# EAGLE board Hank2 (EAGLE 7.7.0)
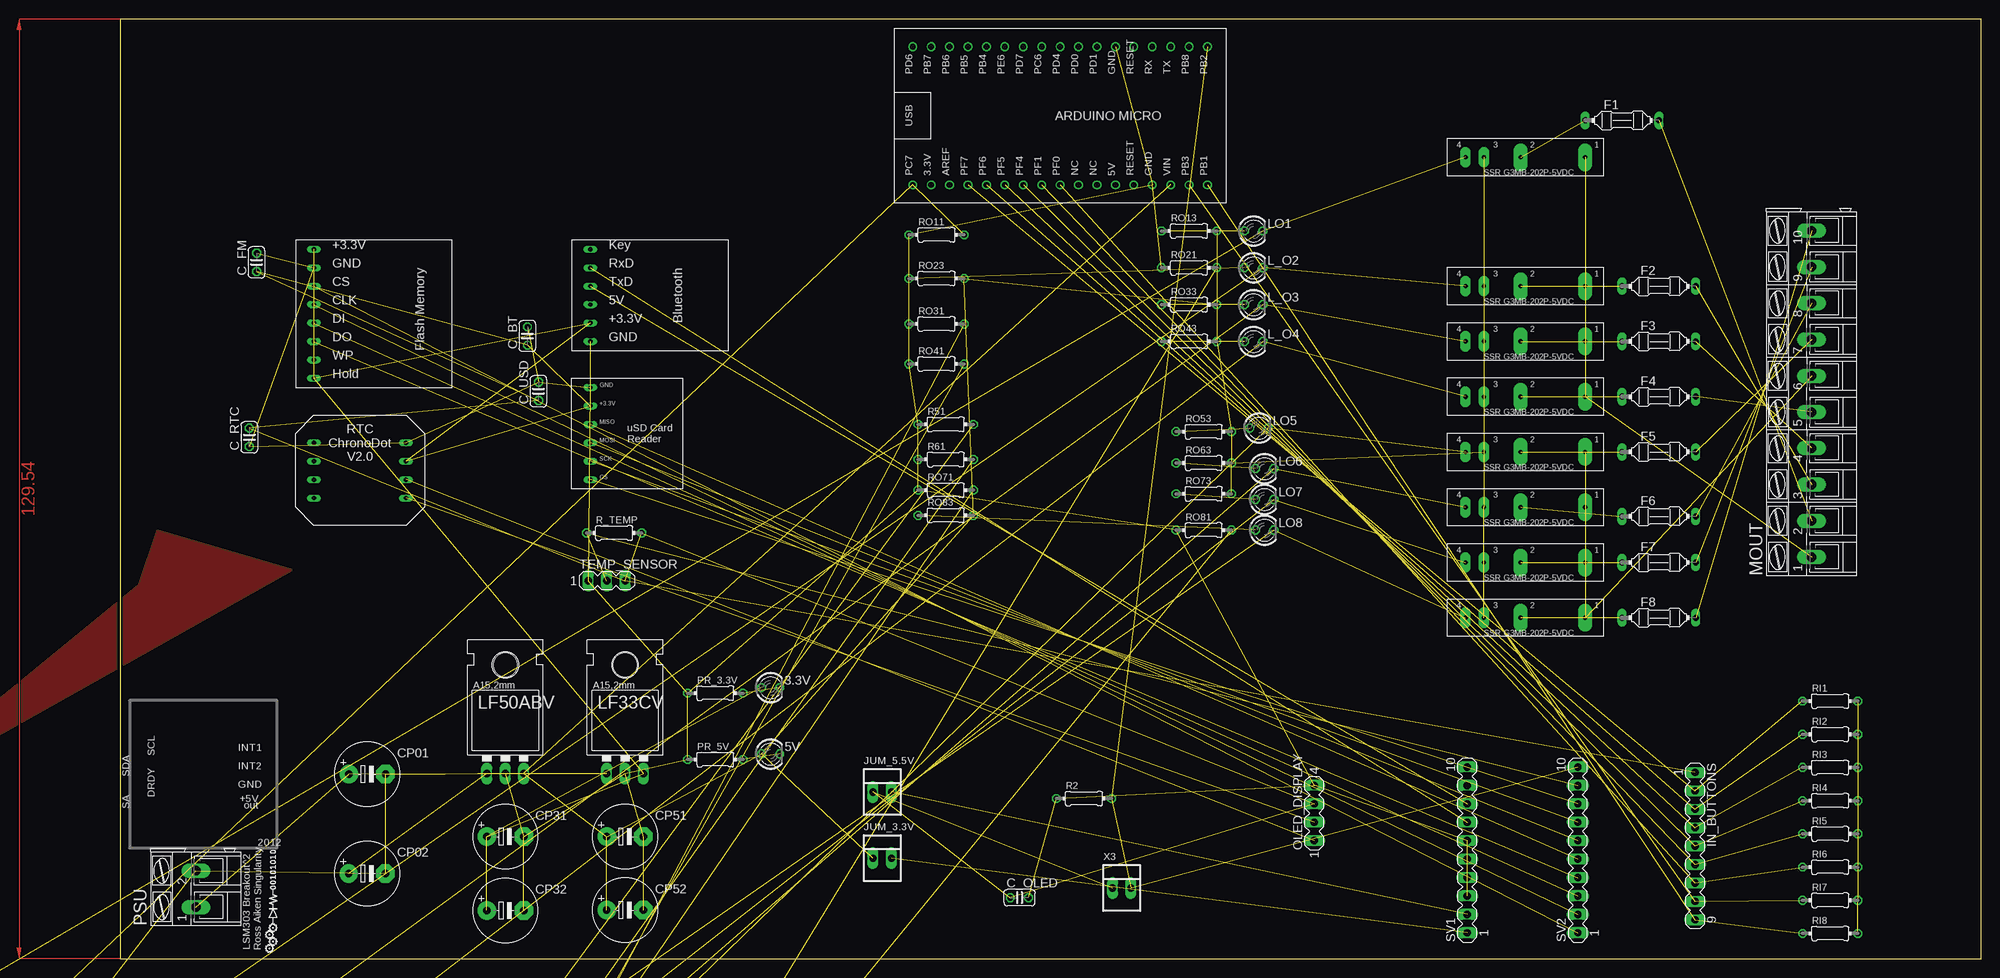
[diagram p0: board, top side]

Size 256.54 x 129.54 mm. Coordinates in mm from the lower left corner, seen from the top.
Outline: 0,0 256.52,0 256.54,129.54 0,129.54 0,0
Copper layers (1*16): Top 0.0356mm / dielectric 1.5011mm / Bottom 0.0356mm
Design rules "default": minimum track width 6mil, minimum drill 13mil, track to track 6mil, track to pad 6mil, pad to pad 6mil, via to via 6mil, smd to smd 0mil, copper to edge 15mil, drill to drill 6mil, minimum pad ring 7mil, minimum via ring 7mil, stop-mask expansion 4mil, vias tented up to drill 0mil, thermal gap 10mil
Net classes: 0 default: width 0.203 mm; 1 vcc: width 0.254 mm

## Footprints (pad centres in the part's own frame; a part is rotated, then mirrored left to right if it is on the bottom)
LED3MM = drill 0.813 octagon: A -1.27,0; K 1.27,0
ARDUINOMICRO_FOOTPRINT = drill 0.8: 3.3V -8.89,11.43; 5V -8.89,-13.97; AREF -8.89,8.89; GND -8.89,-19.05; GND2 10.16,-13.97; NC1 -8.89,-8.89; NC2 -8.89,-11.43; PB1 -8.89,-26.67; PB2 10.16,-26.67; PB3 -8.89,-24.13; PB4 10.16,3.81; PB5 10.16,6.35; PB6 10.16,8.89; PB7 10.16,11.43; PB8 10.16,-24.13; PC6 10.16,-3.81; PC7 -8.89,13.97; PD0 10.16,-8.89; PD1 10.16,-11.43; PD4 10.16,-6.35; PD6 10.16,13.97; PD7 10.16,-1.27; PE6 10.16,1.27; PF0 -8.89,-6.35; PF1 -8.89,-3.81; PF4 -8.89,-1.27; PF5 -8.89,1.27; PF6 -8.89,3.81; PF7 -8.89,6.35; RESET 10.16,-16.51; RESET1 -8.89,-16.51; RX 10.16,-19.05; TX 10.16,-21.59; VIN -8.89,-21.59
C025-024X044 = drill 0.813 octagon: 1 -1.27,0; 2 1.27,0
E5-8,5 = drill 1.016 pad 2.54: + -2.54,0 | drill 1.016 pad 2.54 octagon: - 2.54,0
PICOFUSE = drill 0.813 long: 1 -5.08,0; 2 5.08,0
MA09-1 = drill 1.016 long: 1 -10.16,0; 2 -7.62,0; 3 -5.08,0; 4 -2.54,0; 5 0,0; 6 2.54,0; 7 5.08,0; 8 7.62,0; 9 10.16,0
22-23-2021 = drill 1 long: 1 -1.27,0; 2 1.27,0
78XXL = drill 1.016 long: GND 0,-3.81; IN -2.54,-3.81; OUT 2.54,-3.81 | hole 3.302: 0,11.176
AK300/10 = drill 1.321 long: 1 -22.504,0; 2 -17.501,0; 3 -12.497,0; 4 -7.493,0; 5 -2.515,0; 6 2.489,0; 7 7.493,0; 8 12.497,0; 9 17.501,0; 10 22.504,0
MA04-1 = drill 1.016 long: 1 -3.81,0; 2 -1.27,0; 3 1.27,0; 4 3.81,0
0204/7 = drill 0.813 octagon: 1 -3.81,0; 2 3.81,0
AK300/2 = drill 1.321 long: 1 -2.515,0; 2 2.489,0
SSR_FOOTPRINT = drill 0.6 pad 1.93 long: 1 10.16,0; 2 1.27,0 | drill 0.6 pad 1.422 long: 3 -3.81,0; 4 -6.35,0
MA10-1 = drill 1.016 long: 1 -11.43,0; 2 -8.89,0; 3 -6.35,0; 4 -3.81,0; 5 -1.27,0; 6 1.27,0; 7 3.81,0; 8 6.35,0; 9 8.89,0; 10 11.43,0
TO92-ECB = drill 0.813 long: B 2.54,0; C 0,0; E -2.54,0
MA03-1 = drill 1.016 long: 1 -2.54,0; 2 0,0; 3 2.54,0
FLASHMEMORY_FOOTPRINT = drill 0.6 long: CLK -8.89,1.27; CS -8.89,3.81; DI -8.89,-1.27; DO -8.89,-3.81; GND -8.89,6.35; HOLD -8.89,-8.89; VCC -8.89,8.89; WP -8.89,-6.35
BLUETOOTH_FOOTPRINT = drill 0.6 long: 5V -8.89,1.27; +3.3 -8.89,-1.27; GND -8.89,-3.81; KEY -8.89,8.89; RXD -8.89,6.35; TXD -8.89,3.81
RTC_FOOTPRINT = drill 0.6 long: 32K -6.35,2.54; +3.3V 6.35,2.54; BAT -6.35,5.08; GND 6.35,5.08; RST -6.35,-2.54; SCL 6.35,0; SDA 6.35,-2.54; SQW -6.35,0
SD_CARD_READER_FOOTPRINT = drill 0.6 long: +3.3 -5.08,5.08; CS -5.08,-5.08; GND -5.08,7.62; MISO -5.08,2.54; MOSI -5.08,0; SCK -5.08,-2.54

## Placement (x,y rotation side)
3.3V  [LED3MM]  89.63,37.36 0 top
5V  [LED3MM]  89.63,28.2 0 top
ARDUINO  ARDUINO_MICRO  [ARDUINOMICRO_FOOTPRINT]  123.19,115.57 90 top
C_BT  0.1uF  [C025-024X044]  56.11,85.83 90 top
C_FM  0.1uF  [C025-024X044]  18.77,95.99 90 top
C_OLED  0.1uF  [C025-024X044]  123.93,8.38 0 top
C_RTC  0.1uF  [C025-024X044]  17.77,71.86 90 top
C_USD  0.1uF  [C025-024X044]  57.64,78.21 90 top
CP01  100u  [E5-8,5]  34.02,25.42 0 top
CP02  100n  [E5-8,5]  34.01,11.73 0 top
CP31  100u  [E5-8,5]  53.06,16.8 0 top
CP32  100n  [E5-8,5]  53.06,6.63 0 top
CP51  100u  [E5-8,5]  69.57,16.81 0 top
CP52  100n  [E5-8,5]  69.57,6.67 0 top
F1  SM 092 A0 2A  [PICOFUSE]  207.01,115.57 0 top
F2  SM 092 A0 2A  [PICOFUSE]  212.09,92.71 0 top
F3  SM 092 A0 2A  [PICOFUSE]  212.09,85.09 0 top
F4  SM 092 A0 2A  [PICOFUSE]  212.09,77.47 0 top
F5  SM 092 A0 2A  [PICOFUSE]  212.09,69.85 0 top
F6  SM 092 A0 2A  [PICOFUSE]  212.09,60.96 0 top
F7  SM 092 A0 2A  [PICOFUSE]  212.09,54.61 0 top
F8  SM 092 A0 2A  [PICOFUSE]  212.09,46.99 0 top
IN_BUTTONS  [MA09-1]  217.06,15.51 270 top
JUM_3.3V  22-23-2021  [22-23-2021]  105.02,13.83 0 top
JUM_5.5V  22-23-2021  [22-23-2021]  105.02,22.96 0 top
L_O2  [LED3MM]  156.21,95.25 0 top
L_O3  [LED3MM]  156.21,90.17 0 top
L_O4  [LED3MM]  156.21,85.09 0 top
LF33CV  [78XXL]  69.57,29.32 0 top
LF50ABV  [78XXL]  53.05,29.32 0 top
LO1  [LED3MM]  156.21,100.33 0 top
LO5  [LED3MM]  156.95,73.15 0 top
LO6  [LED3MM]  157.73,67.55 0 top
LO7  [LED3MM]  157.73,63.31 0 top
LO8  [LED3MM]  157.73,59.08 0 top
MOUT  [AK300/10]  233.14,77.86 90 top
OLED_DISPLAY  [MA04-1]  164.59,20.05 90 top
PR_3.3V  1k  [0204/7]  82.01,36.59 0 top
PR_5V  1k  [0204/7]  82.01,27.44 0 top
PSU  [AK300/2]  10.39,9.61 90 top
R2  [0204/7]  132.83,22.05 0 top
R51  10K  [0204/7]  113.78,73.66 0 top
R61  10K  [0204/7]  113.78,68.82 0 top
R_TEMP  4.7K  [0204/7]  68.06,58.68 0 top
RI1  330  [0204/7]  235.7,35.49 0 top
RI2  330  [0204/7]  235.7,30.91 0 top
RI3  330  [0204/7]  235.7,26.34 0 top
RI4  330  [0204/7]  235.7,21.76 0 top
RI5  330  [0204/7]  235.7,17.18 0 top
RI6  330  [0204/7]  235.7,12.61 0 top
RI7  330  [0204/7]  235.7,8.03 0 top
RI8  [0204/7]  235.7,3.45 0 top
RO11  10K  [0204/7]  112.51,99.79 0 top
RO12  10K  [0204/7]  -34.29,-25.4 0 top  (outside the outline)
RO13  1k  [0204/7]  147.32,100.33 0 top
RO21  150  [0204/7]  147.32,95.25 0 top
RO22  10K  [0204/7]  -34.29,-203.2 0 top  (outside the outline)
RO23  1k  [0204/7]  112.51,93.78 0 top
RO31  150  [0204/7]  112.51,87.5 0 top
RO32  10K  [0204/7]  -34.29,-190.5 0 top  (outside the outline)
RO33  [0204/7]  147.32,90.17 0 top
RO41  10k  [0204/7]  112.51,81.99 0 top
RO42  10K  [0204/7]  -34.29,-177.8 0 top  (outside the outline)
RO43  1k  [0204/7]  147.32,85.09 0 top
RO52  10K  [0204/7]  -34.29,-127 0 top  (outside the outline)
RO53  1k  [0204/7]  149.34,72.65 0 top
RO62  10K  [0204/7]  -34.29,-139.7 0 top  (outside the outline)
RO63  1k  [0204/7]  149.34,68.32 0 top
RO71  10K  [0204/7]  113.78,64.58 0 top
RO72  10K  [0204/7]  -34.29,-152.4 0 top  (outside the outline)
RO73  1k  [0204/7]  149.34,64.08 0 top
RO81  10k  [0204/7]  149.34,59.08 0 top
RO82  10K  [0204/7]  -34.29,-165.1 0 top  (outside the outline)
RO83  1k  [0204/7]  113.78,61.11 0 top
SSR1  SSR  [SSR_FOOTPRINT]  191.77,110.49 0 top
SSR2  SSR  [SSR_FOOTPRINT]  191.77,92.71 0 top
SSR3  SSR  [SSR_FOOTPRINT]  191.77,85.09 0 top
SSR4  SSR  [SSR_FOOTPRINT]  191.77,77.47 0 top
SSR5  SSR  [SSR_FOOTPRINT]  191.77,69.85 0 top
SSR6  SSR  [SSR_FOOTPRINT]  191.77,62.23 0 top
SSR7  SSR  [SSR_FOOTPRINT]  191.77,54.61 0 top
SSR8  SSR  [SSR_FOOTPRINT]  191.77,46.99 0 top
SV1  [MA10-1]  185.67,14.97 90 top
SV2  [MA10-1]  200.92,14.97 90 top
T1  2n2222  [TO92-ECB]  -35.56,-12.7 0 top  (outside the outline)
T2  2n2222  [TO92-ECB]  -35.56,-38.1 0 top  (outside the outline)
T3  2n2222  [TO92-ECB]  -35.56,-50.8 0 top  (outside the outline)
T4  2n2222  [TO92-ECB]  -35.56,-63.5 0 top  (outside the outline)
T5  2n2222  [TO92-ECB]  -35.56,-76.2 0 top  (outside the outline)
T6  2n2222  [TO92-ECB]  -35.56,-88.9 0 top  (outside the outline)
T7  2n2222  [TO92-ECB]  -35.56,-101.6 0 top  (outside the outline)
T8  2n2222  [TO92-ECB]  -35.56,-114.3 0 top  (outside the outline)
TEMP_SENSOR  [MA03-1]  67.04,52.08 0 top
U$1  FLASH_MEMORY  [FLASHMEMORY_FOOTPRINT]  35.56,88.9 0 top
U$4  BLUETOOTH  [BLUETOOTH_FOOTPRINT]  73.66,88.9 0 top
U$6  RTC  [RTC_FOOTPRINT]  33.02,66.04 0 top
U$7  SD_CARD_READER  [SD_CARD_READER_FOOTPRINT]  69.85,71.12 0 top
X3  Auto_Manual  [22-23-2021]  138.04,9.72 0 top

## Library data of the parts
3.3V 5V L_O2-L_O4 LO1 LO5-LO8 = led
ARDUINO SSR1-SSR8 U$1 U$4 U$6 U$7 = HankLibraries
C_BT C_FM C_OLED C_RTC C_USD CP01 CP02 CP31 CP32 CP51 CP52 PR_3.3V PR_5V R2 R51 R61 R_TEMP RI1-RI8 RO11-RO13 RO21-RO23 RO31-RO33 RO41-RO43 RO52 RO53 RO62 RO63 RO71-RO73 RO81-RO83 = rcl
F1-F8 = fuse; OC_FARNELL: unknown; OC_NEWARK: unknown
IN_BUTTONS OLED_DISPLAY SV1 SV2 TEMP_SENSOR = con-lstb; OC_FARNELL: unknown; OC_NEWARK: unknown
JUM_3.3V JUM_5.5V X3 = con-molex; MF: MOLEX; MPN: 22-23-2021; OC_FARNELL: 1462926; OC_NEWARK: 25C3832
LF33CV LF50ABV = v-reg
MOUT PSU = con-ptr500; OC_FARNELL: unknown; OC_NEWARK: unknown
T1-T8 = transistor

## Nets
+3V3: 3.3V.A C_BT.1 C_FM.1 C_OLED.1 C_RTC.2 C_USD.1 CP31.+ CP32.+ IN_BUTTONS.1 JUM_5.5V.1 LF33CV.OUT OLED_DISPLAY.3 R_TEMP.2 TEMP_SENSOR.3 U$1.HOLD U$1.VCC U$1.WP U$4.+3.3 U$6.+3.3V U$7.+3.3 X3.1
+5V: 5V.A ARDUINO.VIN CP51.+ CP52.+ JUM_3.3V.1 LF50ABV.OUT RO13.2 RO23.2 RO33.2 RO43.2 RO53.2 RO63.2 RO73.2 RO83.2 SSR1.3 SSR2.3 SSR3.3 SSR4.3 SSR5.3 SSR6.3 SSR7.3 SSR8.3
AUTO_MANUAL: ARDUINO.PB2 R2.2 SV2.10 X3.2
CP12: CP01.+ CP02.+ LF33CV.IN LF50ABV.IN PSU.1
FLASH_CLK: SV2.2 U$1.CLK
FLASH_CS: SV2.1 U$1.CS
FLASH_DI: SV2.3 U$1.DI
FLASH_DO: SV2.4 U$1.DO
GND [vcc]: ARDUINO.GND ARDUINO.GND2 C_BT.2 C_FM.2 C_OLED.2 C_RTC.1 C_USD.2 CP01.- CP02.- CP31.- CP32.- CP51.- CP52.- LF33CV.GND LF50ABV.GND OLED_DISPLAY.4 PR_3.3V.1 PR_5V.1 PSU.2 R2.1 R51.1 R61.1 RO11.1 RO21.1 RO31.1 RO41.1 RO71.1 RO81.1 SV1.3 SV1.4 SV1.5 SV1.6 T3.E TEMP_SENSOR.1 U$1.GND U$4.GND U$6.GND U$7.GND
IN1: ARDUINO.PF7 IN_BUTTONS.2 RI1.1
IN2: ARDUINO.PF6 IN_BUTTONS.3 RI2.1
IN3: ARDUINO.PF5 IN_BUTTONS.4 RI3.1
IN4: ARDUINO.PF4 IN_BUTTONS.5 RI4.1
IN5: ARDUINO.PF1 IN_BUTTONS.6 RI5.1
IN6: ARDUINO.PF0 IN_BUTTONS.7 RI6.1
IN7: ARDUINO.PB3 IN_BUTTONS.8 RI7.1
IN8: ARDUINO.PB1 IN_BUTTONS.9 RI8.1
L1-1: MOUT.1 SSR1.1 SSR2.1 SSR3.1 SSR4.1
L1-2: MOUT.6 SSR5.1 SSR6.1 SSR7.1 SSR8.1
L_O1: L_O2.K SSR2.4 T2.C
L_O3: L_O3.K SSR3.4 T3.C
MISO: SV2.5 U$7.MISO
MO1: F1.2 MOUT.2
MO2: F2.2 MOUT.3
MO3: F3.2 MOUT.4
MO4: F4.2 MOUT.5
MO5: F5.2 MOUT.7
MO6: F6.2 MOUT.8
MO7: F7.2 MOUT.9
MO8: F8.2 MOUT.10
MOSI: SV2.6 U$7.MOSI
MOUT2: F2.1 SSR2.2
MOUT3: F3.1 SSR3.2
MOUT4: F4.1 SSR4.2
MOUT5: F5.1 SSR5.2
MOUT6: F6.1 SSR6.2
MOUT7: F7.1 SSR7.2
MOUT8: F8.1 SSR8.2
N$1: JUM_3.3V.2 SV1.1
N$2: JUM_5.5V.2 SV1.2
N$3: F1.1 SSR1.2
N$4: 5V.K PR_5V.2
N$5: 3.3V.K PR_3.3V.2
N$6: ARDUINO.TX
N$7: RI1.2 RI2.2 RI3.2 RI4.2 RI5.2 RI6.2 RI7.2 RI8.2
N$8: RO12.1 T1.B
N$9: RO52.1 T8.B
N$10: U$4.KEY
N$11: LO5.A RO53.1
N$12: LO5.K SSR5.4 T8.C
N$13: U$4.5V
N$14: SV1.10
N$15: R51.2 RO52.2
N$16: LO6.A RO63.1
N$17: LO6.K SSR6.4 T7.C
N$18: RO62.1 T7.B
N$19: R61.2 RO62.2
N$20: LO7.A RO73.1
N$21: LO7.K SSR7.4 T6.C
N$22: RO72.1 T6.B
N$23: RO42.1 T4.B
N$24: RO71.2 RO72.2
N$25: LO8.A RO83.1
N$26: LO8.K SSR8.4 T5.C
N$27: RO32.1 T3.B
N$28: RO81.2 RO82.2
N$29: LO1.A RO13.1
N$30: LO1.K SSR1.4 T1.C
N$31: RO22.1 T2.B
N$33: L_O2.A RO23.1
N$34: RO82.1 T5.B
N$35: ARDUINO.RX
N$36: RO21.2 RO22.2
N$37: L_O3.A RO33.1
N$40: RO31.2 RO32.2
N$41: L_O4.A RO43.1
N$42: L_O4.K SSR4.4 T4.C
N$44: RO41.2 RO42.2
OUT1: ARDUINO.PC7 RO11.2 RO12.2
OUT2: ARDUINO.PD6
OUT3: ARDUINO.PB7
OUT4: ARDUINO.PB6
OUT5: ARDUINO.PB5
OUT6: ARDUINO.PD7
OUT7: ARDUINO.PC6
OUT8: ARDUINO.PD0
SCK: SV2.7 U$7.SCK
SCL: OLED_DISPLAY.1 U$6.SCL
SD_CS: SV2.8 U$7.CS
SDA: OLED_DISPLAY.2 U$6.SDA
SERIAL_RXD: SV1.7 U$4.RXD
SERIAL_TXD: SV1.8 U$4.TXD
TEMP_SEN: R_TEMP.1 SV2.9 TEMP_SENSOR.2

## Tracks (layer width: path | path; a pad name or v marks a point on that pad's centre or on a via)
+3V3  (20 unrouted)
+5V  (21 unrouted)
AUTO_MANUAL  (3 unrouted)
CP12  (4 unrouted)
FLASH_CLK  (1 unrouted)
FLASH_CS  (1 unrouted)
FLASH_DI  (1 unrouted)
FLASH_DO  (1 unrouted)
GND  (37 unrouted)
  pour Top (isolate 0.152): 5.08,59.05 2.54,51.44 -35.56,20.32 23.65,53.56
IN1  (2 unrouted)
IN2  (2 unrouted)
IN3  (2 unrouted)
IN4  (2 unrouted)
IN5  (2 unrouted)
IN6  (2 unrouted)
IN7  (2 unrouted)
IN8  (2 unrouted)
L1-1  (4 unrouted)
L1-2  (4 unrouted)
L_O1  (2 unrouted)
L_O3  (2 unrouted)
MISO  (1 unrouted)
MO1  (1 unrouted)
MO2  (1 unrouted)
MO3  (1 unrouted)
MO4  (1 unrouted)
MO5  (1 unrouted)
MO6  (1 unrouted)
MO7  (1 unrouted)
MO8  (1 unrouted)
MOSI  (1 unrouted)
MOUT2  (1 unrouted)
MOUT3  (1 unrouted)
MOUT4  (1 unrouted)
MOUT5  (1 unrouted)
MOUT6  (1 unrouted)
MOUT7  (1 unrouted)
MOUT8  (1 unrouted)
N$1  (1 unrouted)
N$2  (1 unrouted)
N$3  (1 unrouted)
N$4  (1 unrouted)
N$5  (1 unrouted)
N$7  (7 unrouted)
N$8  (1 unrouted)
N$9  (1 unrouted)
N$11  (1 unrouted)
N$12  (2 unrouted)
N$15  (1 unrouted)
N$16  (1 unrouted)
N$17  (2 unrouted)
N$18  (1 unrouted)
N$19  (1 unrouted)
N$20  (1 unrouted)
N$21  (2 unrouted)
N$22  (1 unrouted)
N$23  (1 unrouted)
N$24  (1 unrouted)
N$25  (1 unrouted)
N$26  (2 unrouted)
N$27  (1 unrouted)
N$28  (1 unrouted)
N$29  (1 unrouted)
N$30  (2 unrouted)
N$31  (1 unrouted)
N$33  (1 unrouted)
N$34  (1 unrouted)
N$36  (1 unrouted)
N$37  (1 unrouted)
N$40  (1 unrouted)
N$41  (1 unrouted)
N$42  (2 unrouted)
N$44  (1 unrouted)
OUT1  (2 unrouted)
SCK  (1 unrouted)
SCL  (1 unrouted)
SD_CS  (1 unrouted)
SDA  (1 unrouted)
SERIAL_RXD  (1 unrouted)
SERIAL_TXD  (1 unrouted)
TEMP_SEN  (2 unrouted)
(copper drawn outside any net)
  shapes: Top area x1

## Text on the board
tNames: INT1 | SCL | INT2 | SDA | GND | +5V | DRDY | out | SA | 2012 | Singularity | LSM303 Breakout^2 | Ross Aiken | E:/Users/Ross/Desktop/Logo_nocolor.bmp | E:/Users/Ross/Desktop/Logo_nocolor.bmp